# EAGLE board driver led v17 (EAGLE 9.7.0)
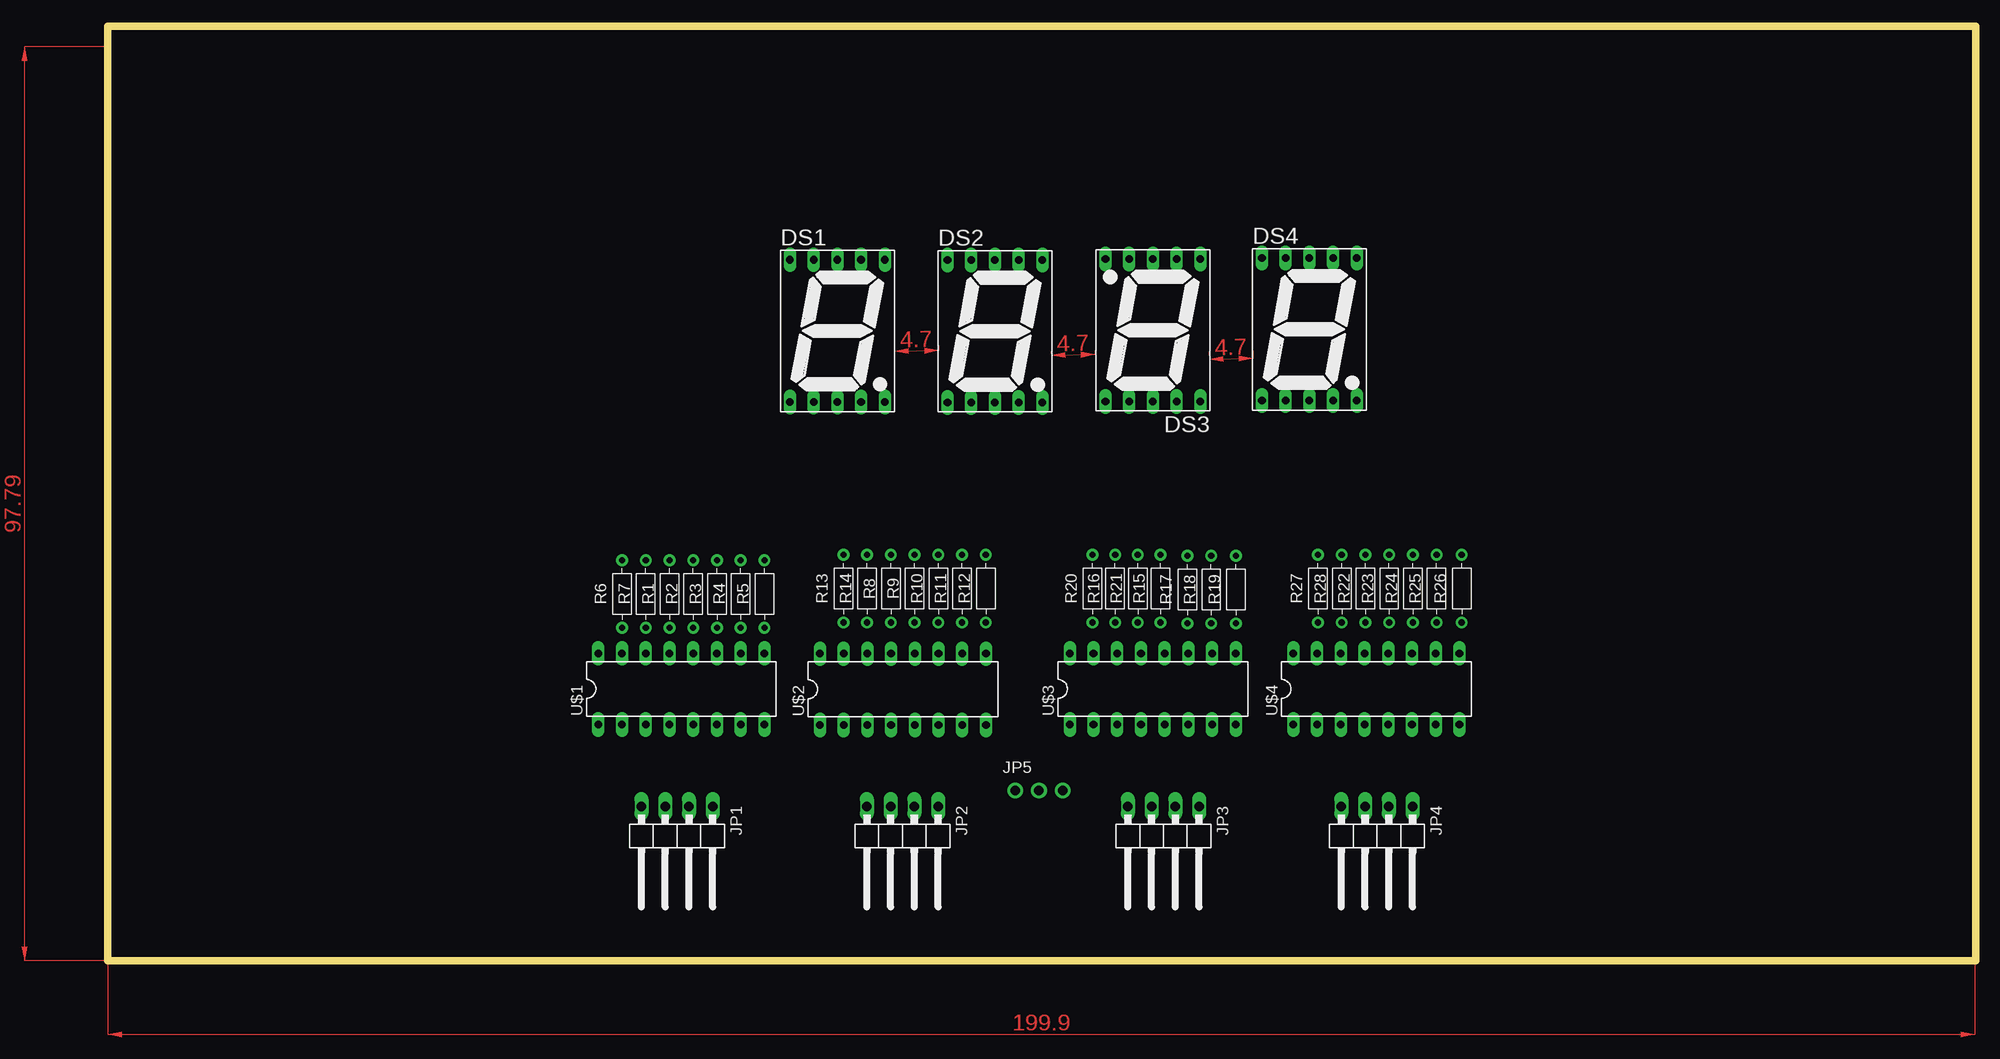
[diagram p0: board, top side]
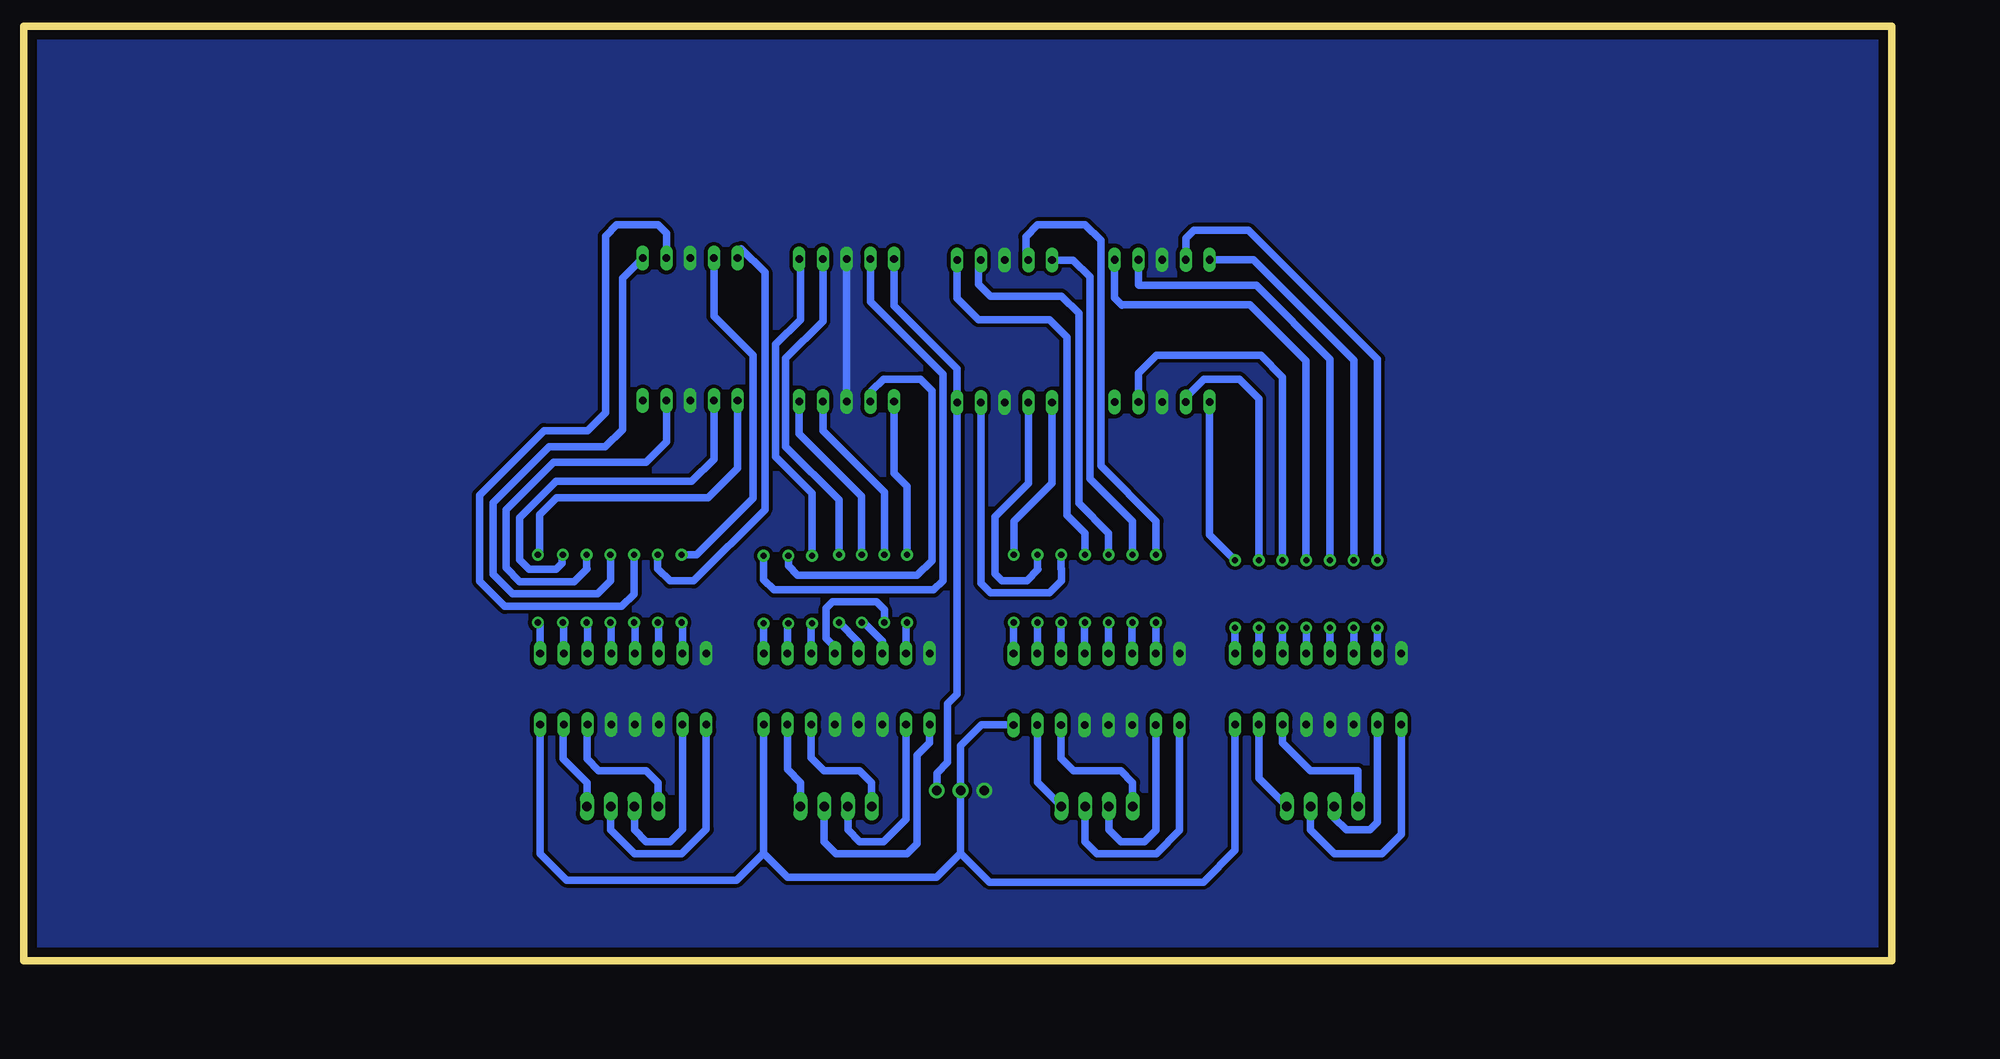
[diagram p1: board, bottom side, seen from below]

Size 200 x 100.3 mm. Coordinates in mm from the lower left corner, seen from the top.
Outline: 0,0 200,0.3
Outline: 200,0.3 200,100.3 0,100
Outline: 0,100 200,100 200,0.3
Outline: 200,0.3 200,0 0,0
Outline: 0,0 0,100
Copper layers (1*16): Top 0.035mm / dielectric 1.5mm / Bottom 0.035mm
Design rules "default": minimum track width 6mil, minimum drill 0.35mm, track to track 6mil, track to pad 6mil, pad to pad 6mil, via to via 6mil, smd to smd 6mil, copper to edge 40mil, drill to drill 6mil, minimum pad ring 10mil, minimum via ring 8mil, stop-mask expansion 4mil, vias tented up to drill 0mil, thermal gap 10mil

## Footprints (pad centres in the part's own frame; a part is rotated, then mirrored left to right if it is on the bottom)
7SEG-13 = drill 0.813 long: 1 -5.08,-7.62; 2 -2.54,-7.62; 3 0,-7.62; 4 2.54,-7.62; 5 5.08,-7.62; 6 5.08,7.62; 7 2.54,7.62; 8 0,7.62; 9 -2.54,7.62; 10 -5.08,7.62
1X04/90 = drill 1.016 long: 1 -3.81,-3.81; 2 -1.27,-3.81; 3 1.27,-3.81; 4 3.81,-3.81
1X03-CLEANBIG = drill 1.016 pad 1.676: 1 -2.54,0; 2 0,0; 3 2.54,0
RESAD724W46L381D178B = drill 0.66 pad 1.26: 1 -3.62,0; 2 3.62,0
DIO16 = drill 0.813 long: 1 -15.24,-3.81; 2 -12.7,-3.81; 3 -10.16,-3.81; 4 -7.62,-3.81; 5 -5.08,-3.81; 6 -2.54,-3.81; 7 0,-3.81; 8 2.54,-3.81; 9 2.54,3.81; 10 0,3.81; 11 -2.54,3.81; 12 -5.08,3.81; 13 -7.62,3.81; 14 -10.16,3.81; 15 -12.7,3.81; 16 -15.24,3.81

## Placement (x,y rotation side)
DS1  7SEG-CK  [7SEG-13]  78.12,67.38 0 top
DS2  7SEG-CK  [7SEG-13]  94.99,67.35 0 top
DS3  7SEG-CK  [7SEG-13]  111.9,67.45 180 top
DS4  7SEG-CK  [7SEG-13]  128.65,67.55 0 top
JP1  PINHD-1X4/90  [1X04/90]  60.96,12.7 180 top
JP2  PINHD-1X4/90  [1X04/90]  85.09,12.7 180 top
JP3  PINHD-1X4/90  [1X04/90]  113.03,12.7 180 top
JP4  PINHD-1X4/90  [1X04/90]  135.89,12.7 180 top
JP5  [1X03-CLEANBIG]  99.7,18.2 0 top
R1  [RESAD724W46L381D178B]  60.15,39.23 90 top
R2  [RESAD724W46L381D178B]  62.69,39.23 90 top
R3  [RESAD724W46L381D178B]  65.23,39.23 90 top
R4  [RESAD724W46L381D178B]  67.77,39.23 90 top
R5  [RESAD724W46L381D178B]  70.31,39.23 90 top
R6  [RESAD724W46L381D178B]  55.07,39.23 90 top
R7  [RESAD724W46L381D178B]  57.61,39.23 90 top
R8  [RESAD724W46L381D178B]  83.85,39.8 90 top
R9  [RESAD724W46L381D178B]  86.39,39.8 90 top
R10  [RESAD724W46L381D178B]  88.93,39.8 90 top
R11  [RESAD724W46L381D178B]  91.47,39.8 90 top
R12  [RESAD724W46L381D178B]  94.01,39.8 90 top
R13  [RESAD724W46L381D178B]  78.77,39.8 90 top
R14  [RESAD724W46L381D178B]  81.31,39.8 90 top
R15  [RESAD724W46L381D178B]  112.72,39.8 90 top
R16  [RESAD724W46L381D178B]  107.86,39.8 90 top
R17  [RESAD724W46L381D178B]  115.6,39.7 90 top
R18  [RESAD724W46L381D178B]  118.14,39.7 90 top
R19  [RESAD724W46L381D178B]  120.78,39.7 90 top
R20  [RESAD724W46L381D178B]  105.44,39.8 90 top
R21  [RESAD724W46L381D178B]  110.28,39.8 90 top
R22  [RESAD724W46L381D178B]  134.65,39.8 90 top
R23  [RESAD724W46L381D178B]  137.19,39.8 90 top
R24  [RESAD724W46L381D178B]  139.73,39.8 90 top
R25  [RESAD724W46L381D178B]  142.27,39.8 90 top
R26  [RESAD724W46L381D178B]  144.95,39.8 90 top
R27  [RESAD724W46L381D178B]  129.57,39.8 90 top
R28  [RESAD724W46L381D178B]  132.11,39.8 90 top
U$1  74LS48  [DIO16]  67.77,29.07 0 top
U$2  74LS48  [DIO16]  91.49,29.03 0 top
U$3  74LS48  [DIO16]  118.24,29.07 0 top
U$4  74LS48  [DIO16]  142.17,29.07 0 top

## Library data of the parts
DS1-DS4 = Opto-Electronic; CATEGORY: Opto-Electronic; SUB-CATEGORY: Display; TYPE: 7-Segment
JP1-JP4 = Connector; CATEGORY: CONNECTOR; SUB-CATEGORY: PIN-HEADER
JP5 = adafruit
R1-R28 = Resistor; CATEGORY: Resistor; SUB-CATEGORY: Fixed
U$1-U$4 = Library

## Nets
A1: JP1.1 U$1.7
A2: JP2.1 U$2.7
A3: JP3.1 U$3.7
A4: JP4.1 U$4.7
B1: JP1.2 U$1.1
B2: JP2.2 U$2.1
B3: JP3.2 U$3.1
B4: JP4.2 U$4.1
C1: JP1.3 U$1.2
C2: JP2.3 U$2.2
C3: JP3.3 U$3.2
C4: JP4.3 U$4.2
D1: JP1.4 U$1.6
D2: JP2.4 U$2.6
D3: JP3.4 U$3.6
D4: JP4.4 U$4.6
GND: JP5.2 U$1.8 U$2.8 U$3.8 U$4.8
IN: DS2.5 DS3.5 JP5.3
N$1: DS1.7 R1.2
N$2: DS1.6 R2.2
N$3: DS1.4 R3.2
N$4: DS1.2 R4.2
N$5: DS1.1 R5.2
N$6: R1.1 U$1.13
N$7: R2.1 U$1.12
N$9: DS2.7 R8.2
N$10: DS2.6 R9.2
N$11: R3.1 U$1.11
N$12: R4.1 U$1.10
N$13: R5.1 U$1.9
N$14: DS1.9 R6.2
N$15: DS1.10 R7.2
N$16: R6.1 U$1.15
N$17: R7.1 U$1.14
N$18: DS2.4 R10.2
N$19: DS2.2 R11.2
N$20: DS2.1 R12.2
N$22: DS2.9 R13.2
N$23: DS2.10 R14.2
N$24: R8.1 U$2.13
N$25: R9.1 U$2.12
N$26: R10.1 U$2.11
N$27: R11.1 U$2.10
N$28: R12.1 U$2.9
N$29: R13.1 U$2.15
N$30: R14.1 U$2.14
N$31: DS3.7 R18.2
N$32: DS3.6 R20.2
N$37: DS3.9 R16.2
N$39: R15.1 U$3.13
N$40: R16.1 U$3.12
N$41: R17.1 U$3.11
N$42: R18.1 U$3.10
N$43: R19.1 U$3.9
N$44: R20.1 U$3.15
N$45: R21.1 U$3.14
N$46: DS4.7 R22.2
N$47: DS4.6 R23.2
N$48: DS4.4 R24.2
N$49: DS4.2 R25.2
N$50: DS4.1 R26.2
N$52: DS4.9 R27.2
N$53: DS4.10 R28.2
N$54: R22.1 U$4.13
N$55: R23.1 U$4.12
N$56: R24.1 U$4.11
N$57: R25.1 U$4.10
N$58: R26.1 U$4.9
N$59: R27.1 U$4.15
N$60: R28.1 U$4.14
N$61: DS3.1 R17.2
N$62: DS3.2 R15.2
N$63: DS3.4 R19.2
N$67: DS3.10 R21.2
VCC: DS1.3 DS1.8 DS2.3 DS2.8 DS3.3 DS3.8 DS4.3 DS4.8 JP5.1 U$1.3 U$1.4 U$1.5 U$1.16 U$2.3 U$2.4 U$2.5 U$2.16 U$3.3 U$3.4 U$3.5 U$3.16 U$4.3 U$4.4 U$4.5 U$4.16

## Tracks (layer width: path | path; a pad name or v marks a point on that pad's centre or on a via)
A1
  Bottom 0.813: JP1.1 67.77,19.51 U$1.7
A2
  Bottom 0.813: JP2.1 91.49,19.1 U$2.7
A3
  Bottom 0.813: JP3.1 116.84,19.05 118.24,20.45 U$3.7
A4
  Bottom 0.813: JP4.1 139.7,19.05 142.24,21.59 142.24,25.19 U$4.7
B1
  Bottom 0.813: JP1.2 62.23,13.97 59.69,11.43 54.61,11.43 52.53,13.51 U$1.1
B2
  Bottom 0.813: JP2.2 86.36,12.7 85.09,11.43 78.74,11.43 76.25,13.92 U$2.1
B3
  Bottom 0.813: JP3.2 114.3,12.7 113.03,11.43 105.41,11.43 104.34,12.5 104.34,21.98 103,23.32 U$3.1
B4
  Bottom 0.813: JP4.2 137.16,13.97 134.62,11.43 129.54,11.43 126.93,14.04 U$4.1
C1
  Bottom 0.813: JP1.3 59.69,15.24 58.42,13.97 55.88,13.97 55.07,14.78 U$1.2
C2
  Bottom 0.813: JP2.3 83.82,13.97 82.55,12.7 80.01,12.7 78.79,13.92 U$2.2
C3
  Bottom 0.813: JP3.3 111.76,13.97 110.49,12.7 107.95,12.7 105.54,15.11 U$3.2
C4
  Bottom 0.813: JP4.3 134.62,13.97 133.35,12.7 130.81,12.7 129.47,14.04 U$4.2
D1
  Bottom 0.813: JP1.4 57.15,20.32 62.23,20.32 65.23,23.32 U$1.6
D2
  Bottom 0.813: JP2.4 81.28,19.05 82.55,20.32 87.63,20.32 88.95,21.64 U$2.6
D3
  Bottom 0.813: JP3.4 109.22,19.05 110.49,20.32 114.3,20.32 115.7,21.72 U$3.6
D4
  Bottom 0.813: JP4.4 132.08,19.05 133.35,20.32 138.43,20.32 139.7,21.59 139.7,25.19 U$4.6
GND
  Bottom 0.152: JP5.2 99.7,18.4
  Bottom 0.813: U$2.8 97.48,25.22 99.7,23 99.7,18.4 99.7,11.5 | U$3.8 120.78,11.48 | 120.78,11.48 118.2,8.9 102.3,8.9 99.7,11.5 | U$4.8 144.71,11.41 141.9,8.6 123.66,8.6 120.78,11.48 | U$1.8 70.31,11.79 73.7,8.4 96.6,8.4 99.7,11.5
IN
  Bottom 0.813: DS3.5 106.82,70.08 100.07,63.34 DS2.5 100.1,59.7 100.1,28.5 101.1,27.5 101.1,21.2 102.24,20.06 JP5.3
N$1
  Bottom 0.813: R1.2 60.15,64.36 68.04,72.25 80.61,72.25 80.66,72.3 DS1.7
N$2
  Bottom 0.813: DS1.6 83.2,70.94 82.41,70.15 82.38,70.18 68.71,70.18 62.71,64.18 62.71,42.87 R2.2
N$3
  Bottom 0.813: R3.2 65.23,62.45 67.55,64.77 78.74,64.77 80.66,62.85 DS1.4
N$4
  Bottom 0.813: R4.2 67.77,60.15 69.85,62.23 73.66,62.23 75.58,60.31 DS1.2
N$5
  Bottom 0.813: R5.2 73.04,45.58 DS1.1
N$6
  Bottom 0.813: R1.1 U$1.13
N$7
  Bottom 0.813: U$1.12 R2.1
N$9
  Bottom 0.813: R8.2 83.85,45.75 87.03,48.93 87.03,69.25 88.9,71.12 96.52,71.12 97.79,72.39 97.79,74.71 DS2.7
N$10
  Bottom 0.813: R9.2 86.39,45.75 88.29,47.65 88.29,66.7 90.17,68.58 97.79,68.58 100.07,70.86 DS2.6
N$11
  Bottom 0.813: R3.1 U$1.11
N$12
  Bottom 0.813: R4.1 U$1.10
N$13
  Bottom 0.813: R5.1 U$1.9
N$14
  Bottom 0.813: R6.2 55.07,64.36 68.86,78.15 74.71,78.15 75.58,77.28 DS1.9
N$15
  Bottom 0.813: R7.2 57.61,64.27 68.34,75 DS1.10
N$16
  Bottom 0.813: R6.1 U$1.15
N$17
  Bottom 0.813: U$1.14 R7.1
N$18
  Bottom 0.813: R10.2 88.93,41.94 88.9,41.91 88.9,40.64 90.17,39.37 96.52,39.37 97.53,40.38 DS2.4
N$19
  Bottom 0.813: R11.2 91.47,41.94 91.39,41.86 92.61,40.64 95.25,40.64 96.02,41.41 96.02,47.49 92.45,51.06 DS2.2
N$20
  Bottom 0.813: R12.2 93.98,43.45 93.98,46.99 89.91,51.06 DS2.1
N$22
  Bottom 0.813: R13.2 78.77,47.02 84.69,52.94 84.69,77.07 86.36,78.74 91.44,78.74 92.71,77.47 92.71,75.23 DS2.9
N$23
  Bottom 0.813: R14.2 81.31,47.02 85.86,51.57 85.86,73.16 87.67,74.97 DS2.10
N$24
  Bottom 0.813: U$2.13 83.87,36.16 R8.1
N$25
  Bottom 0.813: U$2.12 86.41,36.16 R9.1
N$26
  Bottom 0.813: U$2.11 88.95,36.16 R10.1
N$27
  Bottom 0.813: U$2.10 91.49,36.16 R11.1
N$28
  Bottom 0.813: U$2.9 94.03,36.16 R12.1
N$29
  Bottom 0.813: U$2.15 78.77,32.86 R13.1
N$30
  Bottom 0.813: U$2.14 81.33,36.16 R14.1
N$31
  Bottom 0.813: R18.2 118.14,42.24 117.14,41.24 104.34,41.24 102.77,42.81 102.77,60.99 104.01,62.23 107.95,62.23 109.22,60.96 109.22,59.69 DS3.7
N$32
  Bottom 0.813: R20.2 105.44,50.77 106.82,52.15 DS3.6
N$37
  Bottom 0.813: R16.2 107.86,50.11 114.44,56.69 DS3.9
N$39
  Bottom 0.813: U$3.13 110.62,34.08 R15.1
N$40
  Bottom 0.813: U$3.12 113.16,33.54 114.1,34.48 114.1,37.68 113.4,38.38 108.7,38.38 107.86,37.54 R16.1
N$41
  Bottom 0.813: R17.1 115.7,35.98 U$3.11
N$42
  Bottom 0.813: R18.1 118.24,35.98 U$3.10
N$43
  Bottom 0.813: R19.1 U$3.9
N$44
  Bottom 0.813: R20.1 105.54,36.08 U$3.15
N$45
  Bottom 0.813: U$3.14 108.08,34.16 110.1,36.18 R21.1
N$46
  Bottom 0.813: DS4.7 131.19,77.85 132.08,78.74 136.5,78.74 137.7,77.54 137.7,58.6 139.6,56.7 144.3,56.7 151.2,49.8 151.2,40.6 148.5,37.9 135.97,37.9 134.65,39.22 R22.2
N$47
  Bottom 0.813: DS4.6 135.89,73.01 135.89,56.82 137.73,54.98 143.75,54.98 149.73,49 149.73,41.34 147.66,39.27 138.58,39.27 137.19,40.66 R23.2
N$48
  Bottom 0.813: R24.2 139.73,41.94 139.7,41.91 141.08,40.53 146.88,40.53 148.36,42.01 148.36,48.23 143.25,53.34 133.35,53.34 131.19,55.5 DS4.4
N$49
  Bottom 0.813: R25.2 142.37,43.32 142.37,42.54 143.01,41.9 145.91,41.9 146.92,42.91 146.92,47.39 143.01,51.3 128.48,51.3 126.11,53.67 DS4.2
N$50
  Bottom 0.813: R26.2 144.78,43.59 144.78,47.72 142.97,49.53 126.71,49.53 123.57,52.67 DS4.1
N$52
  Bottom 0.813: R27.2 127.97,43.42 121.92,49.47 121.92,64.77 126.11,68.96 DS4.9
N$53
  Bottom 0.813: R28.2 132.11,41.94 130.81,40.64 128.27,40.64 120.65,48.26 120.65,73.66 123.19,76.2 123.57,75.82 DS4.10
N$54
  Bottom 0.813: R22.1 134.55,36.08 U$4.13
N$55
  Bottom 0.813: R23.1 137.09,36.08 U$4.12
N$56
  Bottom 0.813: R24.1 139.63,36.08 U$4.11
N$57
  Bottom 0.813: R25.1 142.17,36.08 U$4.10
N$58
  Bottom 0.813: U$4.9 144.71,35.94 R26.1
N$59
  Bottom 0.813: R27.1 129.47,36.08 U$4.15
N$60
  Bottom 0.813: R28.1 132.01,36.08 U$4.14
N$61
  Bottom 0.813: DS3.1 116.84,74.93 116.84,68.58 119.48,65.94 119.48,53.91 115.6,50.03 R17.2
N$62
  Bottom 0.813: R15.2 112.72,49.29 118.42,54.99 118.42,64.46 114.44,68.44 DS3.2
N$63
  Bottom 0.813: R19.2 120.78,40.77 119.68,39.67 102.57,39.67 101.6,40.64 101.6,62.76 109.36,70.52 DS3.4
N$67
  Bottom 0.813: R21.2 110.28,49.69 116.98,56.39 DS3.10
VCC
  Bottom 0.813: DS3.8 DS3.3
  pour Bottom (isolate 0.406, no thermals): 0.51,0.31 199.79,0.31 199.79,99.69 0.51,99.69
(copper drawn outside any net)
  shapes: Top area x5